# EAGLE board NILMCape (EAGLE 6.4)

Size 100 x 100 mm. Coordinates in mm from the lower left corner, seen from the top.
Copper layers (1*16): Top 0.035mm / dielectric 1.5mm / Bottom 0.035mm
Design rules "default": minimum track width 10mil, minimum drill 24mil, track to track 8mil, track to pad 8mil, pad to pad 8mil, via to via 8mil, smd to smd 8mil, copper to edge 40mil, drill to drill 8mil, minimum pad ring 10mil, minimum via ring 8mil, stop-mask expansion 4mil, vias tented up to drill 0mil, thermal gap 10mil

## Footprints (pad centres in the part's own frame; a part is rotated, then mirrored left to right if it is on the bottom)
0805 = smd 0.8 x 1.2: 1 -0.9,0; 2 0.9,0
1210 = smd 1.2 x 2: 1 -1.6,0; 2 1.6,0
CPOL-RADIAL-100UF-25V = drill 0.7 pad 1.651 square: 1 1.27,0 | drill 0.7 pad 1.651: 2 -1.27,0
CPOL-RADIAL-10UF-25V = drill 0.7 pad 1.651 square: 1 1.27,0 | drill 0.7 pad 1.651: 2 -1.27,0
1206 = smd 1.6 x 1.8: 1 -1.4,0; 2 1.4,0
PM64 = smd 1.676 x 0.279: 1 -5.613,3.759; 2 -5.613,3.251; 3 -5.613,2.743; 4 -5.613,2.261; 5 -5.613,1.753; 6 -5.613,1.245; 7 -5.613,0.762; 8 -5.613,0.254; 9 -5.613,-0.254; 10 -5.613,-0.762; 11 -5.613,-1.245; 12 -5.613,-1.753; 13 -5.613,-2.261; 14 -5.613,-2.743; 15 -5.613,-3.251; 16 -5.613,-3.759; 33 5.613,-3.759; 34 5.613,-3.251; 35 5.613,-2.743; 36 5.613,-2.261; 37 5.613,-1.753; 38 5.613,-1.245; 39 5.613,-0.762; 40 5.613,-0.254; 41 5.613,0.254; 42 5.613,0.762; 43 5.613,1.245; 44 5.613,1.753; 45 5.613,2.261; 46 5.613,2.743; 47 5.613,3.251; 48 5.613,3.759 | smd 0.279 x 1.676: 17 -3.759,-5.613; 18 -3.251,-5.613; 19 -2.743,-5.613; 20 -2.261,-5.613; 21 -1.753,-5.613; 22 -1.245,-5.613; 23 -0.762,-5.613; 24 -0.254,-5.613; 25 0.254,-5.613; 26 0.762,-5.613; 27 1.245,-5.613; 28 1.753,-5.613; 29 2.261,-5.613; 30 2.743,-5.613; 31 3.251,-5.613; 32 3.759,-5.613; 49 3.759,5.613; 50 3.251,5.613; 51 2.743,5.613; 52 2.261,5.613; 53 1.753,5.613; 54 1.245,5.613; 55 0.762,5.613; 56 0.254,5.613; 57 -0.254,5.613; 58 -0.762,5.613; 59 -1.245,5.613; 60 -1.753,5.613; 61 -2.261,5.613; 62 -2.743,5.613; 63 -3.251,5.613; 64 -3.759,5.613
5PFF = drill 0.8 square: 1 -1.91,0 | drill 0.8: 2 0,0; 3 1.91,0 | drill 2: A1 -7.5,21.4; A2 -6.5,21.4; A3 -3.5,21.4; A4 -5.5,21.4; A5 -4.5,21.4; B1 8,21.4; B2 5,21.4; B3 7,21.4; B4 4,21.4; B5 6,21.4
SOIC-16 = smd 1.549 x 0.61: 1 -2.692,4.445; 2 -2.692,3.175; 3 -2.692,1.905; 4 -2.692,0.635; 5 -2.692,-0.635; 6 -2.692,-1.905; 7 -2.692,-3.175; 8 -2.692,-4.445; 9 2.692,-4.445; 10 2.692,-3.175; 11 2.692,-1.905; 12 2.692,-0.635; 13 2.692,0.635; 14 2.692,1.905; 15 2.692,3.175; 16 2.692,4.445
DGG56 = smd 1.676 x 0.279: 1 -3.658,6.756; 2 -3.658,6.248; 3 -3.658,5.74; 4 -3.658,5.258; 5 -3.658,4.75; 6 -3.658,4.242; 7 -3.658,3.759; 8 -3.658,3.251; 9 -3.658,2.743; 10 -3.658,2.261; 11 -3.658,1.753; 12 -3.658,1.245; 13 -3.658,0.762; 14 -3.658,0.254; 15 -3.658,-0.254; 16 -3.658,-0.762; 17 -3.658,-1.245; 18 -3.658,-1.753; 19 -3.658,-2.261; 20 -3.658,-2.743; 21 -3.658,-3.251; 22 -3.658,-3.759; 23 -3.658,-4.242; 24 -3.658,-4.75; 25 -3.658,-5.258; 26 -3.658,-5.74; 27 -3.658,-6.248; 28 -3.658,-6.756; 29 3.658,-6.756; 30 3.658,-6.248; 31 3.658,-5.74; 32 3.658,-5.258; 33 3.658,-4.75; 34 3.658,-4.242; 35 3.658,-3.759; 36 3.658,-3.251; 37 3.658,-2.743; 38 3.658,-2.261; 39 3.658,-1.753; 40 3.658,-1.245; 41 3.658,-0.762; 42 3.658,-0.254; 43 3.658,0.254; 44 3.658,0.762; 45 3.658,1.245; 46 3.658,1.753; 47 3.658,2.261; 48 3.658,2.743; 49 3.658,3.251; 50 3.658,3.759; 51 3.658,4.242; 52 3.658,4.75; 53 3.658,5.258; 54 3.658,5.74; 55 3.658,6.248; 56 3.658,6.756
RKG41 = smd 1.6 x 1.702: 1 0,0; 11 0,-10.109; 19 8.179,-10.109; 29 8.179,0 | smd 0.94 x 0.61: 2 -0.33,-1.448; 3 -0.33,-2.362; 4 -0.33,-3.251; 5 -0.33,-4.166; 6 -0.33,-5.055; 7 -0.33,-5.944; 8 -0.33,-6.858; 9 -0.33,-7.747; 10 -0.33,-8.661; 20 8.509,-8.661; 21 8.509,-7.747; 22 8.509,-6.858; 23 8.509,-5.944; 24 8.509,-5.055; 25 8.509,-4.166; 26 8.509,-3.251; 27 8.509,-2.362; 28 8.509,-1.448 | smd 0.61 x 0.94: 12 1.397,-10.49; 13 2.286,-10.49; 14 3.2,-10.49; 15 4.089,-10.49; 16 4.978,-10.49; 17 5.893,-10.49; 18 6.782,-10.49; 30 6.782,0.381; 31 5.893,0.381; 32 4.978,0.381; 33 4.089,0.381; 34 3.2,0.381; 35 2.286,0.381; 36 1.397,0.381 | smd 1.1 x 2.25: 37 3.88,-1.75 | smd 3.1 x 2.2: 38 2.8,-5.16; 39 2.8,-8.64 | smd 1.4 x 1.24: 40 6.43,-9.11 | smd 2.04 x 3.05: 41 6.75,-6.37
RGW20_3P15X3P15 = smd 0.991 x 0.356: 1 -2.388,1.295; 2 -2.388,0.66; 3 -2.388,0; 4 -2.388,-0.66; 5 -2.388,-1.295; 11 2.388,-1.295; 12 2.388,-0.66; 13 2.388,0; 14 2.388,0.66; 15 2.388,1.295 | smd 0.356 x 0.991: 6 -1.295,-2.388; 7 -0.66,-2.388; 8 0,-2.388; 9 0.66,-2.388; 10 1.295,-2.388; 16 1.295,2.388; 17 0.66,2.388; 18 0,2.388; 19 -0.66,2.388; 20 -1.295,2.388 | smd 3.15 x 3.15: 21 0,0
KVU3 = smd 0.94 x 2.489: 1 -2.286,-6.401; 3 2.286,-6.401 | smd 6.706 x 6.528: 2 0,0.152
PW14 = smd 1.676 x 0.356: 1 -2.819,1.956; 2 -2.819,1.295; 3 -2.819,0.66; 4 -2.819,0; 5 -2.819,-0.66; 6 -2.819,-1.295; 7 -2.819,-1.956; 8 2.819,-1.956; 9 2.819,-1.295; 10 2.819,-0.66; 11 2.819,0; 12 2.819,0.66; 13 2.819,1.295; 14 2.819,1.956
DGN8_1P89X1P57 = smd 1.575 x 0.432: 1 -2.083,0.965; 2 -2.083,0.33; 3 -2.083,-0.33; 4 -2.083,-0.965; 5 2.083,-0.965; 6 2.083,-0.33; 7 2.083,0.33; 8 2.083,0.965 | smd 1.575 x 1.88: EPAD 0,0
BEAGLEBONE_SHIELD = drill 1 square: 1 4.445,19.05; 47 52.705,19.05 | drill 1: 2 1.905,19.05; 3 4.445,21.59; 4 1.905,21.59; 5 4.445,24.13; 6 1.905,24.13; 7 4.445,26.67; 8 1.905,26.67; 9 4.445,29.21; 10 1.905,29.21; 11 4.445,31.75; 12 1.905,31.75; 13 4.445,34.29; 14 1.905,34.29; 15 4.445,36.83; 16 1.905,36.83; 17 4.445,39.37; 18 1.905,39.37; 19 4.445,41.91; 20 1.905,41.91; 21 4.445,44.45; 22 1.905,44.45; 23 4.445,46.99; 24 1.905,46.99; 25 4.445,49.53; 26 1.905,49.53; 27 4.445,52.07; 28 1.905,52.07; 29 4.445,54.61; 30 1.905,54.61; 31 4.445,57.15; 32 1.905,57.15; 33 4.445,59.69; 34 1.905,59.69; 35 4.445,62.23; 36 1.905,62.23; 37 4.445,64.77; 38 1.905,64.77; 39 4.445,67.31; 40 1.905,67.31; 41 4.445,69.85; 42 1.905,69.85; 43 4.445,72.39; 44 1.905,72.39; 45 4.445,74.93; 46 1.905,74.93; 48 50.165,19.05; 49 52.705,21.59; 50 50.165,21.59; 51 52.705,24.13; 52 50.165,24.13; 53 52.705,26.67; 54 50.165,26.67; 55 52.705,29.21; 56 50.165,29.21; 57 52.705,31.75; 58 50.165,31.75; 59 52.705,34.29; 60 50.165,34.29; 61 52.705,36.83; 62 50.165,36.83; 63 52.705,39.37; 64 50.165,39.37; 65 52.705,41.91; 66 50.165,41.91; 67 52.705,44.45; 68 50.165,44.45; 69 52.705,46.99; 70 50.165,46.99; 71 52.705,49.53; 72 50.165,49.53; 73 52.705,52.07; 74 50.165,52.07; 75 52.705,54.61; 76 50.165,54.61; 77 52.705,57.15; 78 50.165,57.15; 79 52.705,59.69; 80 50.165,59.69; 81 52.705,62.23; 82 50.165,62.23; 83 52.705,64.77; 84 50.165,64.77; 85 52.705,67.31; 86 50.165,67.31; 87 52.705,69.85; 88 50.165,69.85; 89 52.705,72.39; 90 50.165,72.39; 91 52.705,74.93; 92 50.165,74.93
TSSOP14_MC = smd 1.473 x 0.356: 1 -2.819,1.956; 2 -2.819,1.295; 3 -2.819,0.66; 4 -2.819,0; 5 -2.819,-0.66; 6 -2.819,-1.295; 7 -2.819,-1.956; 8 2.819,-1.956; 9 2.819,-1.295; 10 2.819,-0.66; 11 2.819,0; 12 2.819,0.66; 13 2.819,1.295; 14 2.819,1.956

## Placement (x,y rotation side)
C1  .33uF  [0805]  10.16,89.53 0 top
C2  .33uF  [0805]  15.24,89.53 0 top
C3  .33uF  [0805]  20.32,98.43 180 top
C4  .33uF  [0805]  15.24,98.43 180 top
C5  .33uF  [0805]  -11.43,97.16 0 top  (outside the outline)
C6  .33uF  [0805]  -7.62,97.16 0 top  (outside the outline)
C7  .33uF  [0805]  -11.43,92.07 0 top  (outside the outline)
C8  4.7uF 50V  [1210]  74.93,70.48 270 top
C9  .33uF  [0805]  -7.62,92.07 0 top  (outside the outline)
C10  1uF  [0805]  -11.43,76.84 0 top  (outside the outline)
C11  1uF  [0805]  -11.43,107.31 0 top  (outside the outline)
C12  4.7uF 50V  [1210]  78.1,70.48 270 top
C13  2.2uF 100V  [1210]  81.28,70.48 270 top
C14  22uF 100V  [CPOL-RADIAL-100UF-25V]  66.04,79.38 270 top
C15  22uF 25V  [1210]  71.75,79.38 270 top
C16  22uF 25V  [1210]  74.93,79.38 270 top
C17  22uF 25V  [1210]  78.1,79.38 270 top
C18  22uF 25V  [1210]  81.28,79.38 270 top
C19  10nF  [0805]  82.55,66.67 0 top
C20  22uF  [1210]  67.31,66.67 90 top
C21  2.2uF 100V  [1210]  71.75,94.62 270 top
C22  2.2uF 100V  [1210]  74.93,94.62 270 top
C23  22uF  [1210]  78.1,94.62 90 top
C24  2.2uF 100V  [1210]  71.12,85.72 270 top
C25  22uF  [1210]  81.28,94.62 90 top
C26  10nF  [0805]  81.28,85.72 270 top
C27  27uF 100V  [CPOL-RADIAL-100UF-25V]  66.04,94.62 90 top
C28  1uF  [0805]  49.53,89.53 180 top
C29  47uF  [1210]  54.61,94.62 270 top
C30  1uF  [0805]  49.53,74.29 180 top
C31  10nF  [0805]  52.07,80.65 270 top
C32  47uF  [1210]  45.72,80.65 270 top
C33  10uF  [CPOL-RADIAL-10UF-25V]  38.1,71.75 0 top
C34  .1uF  [0805]  31.75,34.92 90 top
C35  .1uF  [0805]  13.97,51.43 0 top
C36  .1uF  [0805]  13.97,38.73 0 top
C37  .1uF  [0805]  13.97,23.49 0 top
C38  .1uF  [0805]  34.29,34.92 90 top
C39  .1uF  [0805]  41.91,9.52 0 top
C40  .1uF  [0805]  46.99,34.92 90 top
C41  .1uF  [0805]  13.97,8.25 0 top
C42  .1uF  [0805]  19.05,34.92 90 top
C43  .1uF  [0805]  13.97,36.2 0 top
C44  .1uF  [0805]  13.97,20.95 0 top
C45  .1uF  [0805]  41.91,22.22 0 top
C46  10uF  [1210]  -10.16,-17.15 0 top  (outside the outline)
C47  10uF  [1210]  -10.16,-20.96 0 top  (outside the outline)
C48  10uF  [1210]  -10.16,-24.77 0 top  (outside the outline)
C49  10nF  [0805]  -11.43,-34.93 0 top  (outside the outline)
C50  10nF  [0805]  -11.43,-40.01 0 top  (outside the outline)
C51  10uF  [1206]  -10.16,-65.41 0 top  (outside the outline)
C52  10uF  [1206]  -10.16,-60.32 0 top  (outside the outline)
C53  10uF  [1210]  -10.16,-69.22 0 top  (outside the outline)
C54  10uF  [1210]  -10.16,-73.03 0 top  (outside the outline)
C55  .1uF  [0805]  -11.43,-78.1 0 top  (outside the outline)
C56  10uF  [1210]  -10.16,-87 0 top  (outside the outline)
C57  .1uF  [0805]  -11.43,-83.19 0 top  (outside the outline)
C58  1uF  [0805]  -11.43,-92.07 0 top  (outside the outline)
C59  .1uF  [0805]  -11.43,-97.16 0 top  (outside the outline)
C60  .1uF  [0805]  -11.43,-102.24 0 top  (outside the outline)
C61  .1uF  [0805]  -11.43,-107.31 0 top  (outside the outline)
C62  .1uF  [0805]  -11.43,-112.4 0 top  (outside the outline)
C63  .1uF  [0805]  -11.43,-117.47 0 top  (outside the outline)
C64  .1uF  [0805]  -11.43,-122.56 0 top  (outside the outline)
C65  .1uF  [0805]  -20.32,-178.44 0 top  (outside the outline)
C66  .1uF  [0805]  -20.32,-182.25 0 top  (outside the outline)
C67  .1uF  [0805]  -20.32,-186.06 0 top  (outside the outline)
C68  .1uF  [0805]  -20.32,-189.86 0 top  (outside the outline)
C69  .1uF  [0805]  -20.32,-193.67 0 top  (outside the outline)
C70  .1uF  [0805]  -20.32,-197.48 0 top  (outside the outline)
C71  .1uF  [0805]  -20.32,-202.56 0 top  (outside the outline)
C72  10nF  [0805]  -20.32,-207.64 0 top  (outside the outline)
C73  10nF  [0805]  -20.32,-212.72 0 top  (outside the outline)
C74  10nF  [0805]  -20.32,-217.81 0 top  (outside the outline)
C75  .1uF  [0805]  -20.32,-222.88 0 top  (outside the outline)
R1  8.2k  [0805]  -11.43,87 0 top  (outside the outline)
R2  8.2k  [0805]  20.32,88.26 180 top
R3  8.2k  [0805]  15.24,93.34 0 top
R4  8.2k  [0805]  10.16,93.34 0 top
R5  8.2k  [0805]  20.32,93.34 180 top
R6  1k  [0805]  -11.43,112.4 0 top  (outside the outline)
R7  8.2k  [0805]  -7.62,87 0 top  (outside the outline)
R8  8.2k  [0805]  -11.43,81.91 0 top  (outside the outline)
R9  8.2k  [0805]  -7.62,81.91 0 top  (outside the outline)
R10  1k  [0805]  -11.43,102.23 0 top  (outside the outline)
R11  178k  [0805]  91.44,66.67 270 top
R12  0  [0805]  86.36,64.13 90 top
R13  1k  [0805]  -11.43,71.75 0 top  (outside the outline)
R14  0  [0805]  -20.32,-160.66 0 top  (outside the outline)
R15  174k  [0805]  81.28,64.13 90 top
R16  15.8k  [0805]  83.82,64.13 270 top
R17  178k  [0805]  78.74,98.43 180 top
R18  178k  [0805]  78.74,85.72 270 top
R19  174k  [0805]  74.93,98.43 180 top
R20  15.8k  [0805]  76.2,85.72 270 top
R21  0  [0805]  73.66,85.72 270 top
R22  0  [0805]  96.52,76.84 90 top
R23  1.5M  [0805]  49.53,80.65 90 top
R24  162k  [0805]  49.53,76.84 0 top
R25  499k  [0805]  -11.43,-45.09 0 top  (outside the outline)
R26  154k  [0805]  -11.43,-50.16 0 top  (outside the outline)
R27  0  [0805]  -20.32,-165.73 0 top  (outside the outline)
U1  ADS8568_PM_64  [PM64]  29.21,70.48 0 top
U2  ACS756KCA-050B-PFF-T  [5PFF]  55.88,24.77 270 top
U3  SI8663BC-B-IS1  [SOIC-16]  40.64,34.92 270 top
U4  SN74CBT16390_DGG  [DGG56]  29.21,18.41 0 top
U5  TPS84250_RKG_41  [RKG41]  92.71,84.46 180 top
U6  TPS7A3301_RGW_20  [RGW20_3P15X3P15]  57.15,79.38 0 top
U7  LP2950-33_KVU_3  [KVU3]  57.15,66.67 90 top
U8  SI8663BC-B-IS1  [SOIC-16]  13.97,14.6 0 top
U9  TL074_PW_14  [PW14]  13.97,83.19 0 top
U10  SI8663BC-B-IS1  [SOIC-16]  13.97,29.84 0 top
U11  SI8663BC-B-IS1  [SOIC-16]  13.97,45.09 0 top
U12  SI8663BC-B-IS1  [SOIC-16]  25.4,34.92 270 top
U13  SI8663BC-B-IS1  [SOIC-16]  41.91,15.87 0 top
U14  SN74CBT16390_DGG  [DGG56]  29.21,50.16 0 top
U15  TPS7A4901_DGN_8  [DGN8_1P89X1P57]  -7.62,-29.84 0 top  (outside the outline)
U16  SI8660BC-B-IS1  [SOIC-16]  -17.78,-139.06 0 top  (outside the outline)
U$1  BEAGLEBONE_OUTLINE  [BEAGLEBONE_SHIELD]  0,-14.61 0 top
U$2  TPS84259_RKG_41  [RKG41]  92.71,69.22 180 top
U$3  TPS7A4700_RGW_20  [RGW20_3P15X3P15]  49.53,94.62 270 top
U$4  MAX548X  [TSSOP14_MC]  -7.62,-128.91 0 top  (outside the outline)
U$5  MAX548X  [TSSOP14_MC]  -17.78,-147.95 0 top  (outside the outline)
U$6  MAX548X  [TSSOP14_MC]  -17.78,-154.31 0 top  (outside the outline)
U$7  MAX548X  [TSSOP14_MC]  -17.78,-172.09 0 top  (outside the outline)

## Library data of the parts
C1-C13 C15-C75 R1-R10 R13 R14 R27 U1 U3-U16 U$1-U$7 = SensorCape
C14 R11 R12 R15-R26 = ASL
U2 = SensorCape; TEMP: -40 to +125

## Nets
AA1_R_IN: R27.1 U$4.10
AA1_R_OUT: C73.2 U1.42 U$4.11
AA2_R_IN: U$5.10
AA2_R_OUT: C74.2 U1.47 U$5.11
AA3_R_IN: U2.3 U$7.10
AA3_R_OUT: C72.2 U1.49 U$7.11
ADC_DB0: U1.33 U14.1
ADC_DB1: U1.32 U14.54
ADC_DB2: U1.31 U14.4
ADC_DB3: U1.30 U14.51
ADC_DB4: U1.29 U14.7
ADC_DB5: U1.28 U14.48
ADC_DB6: U1.27 U14.10
ADC_DB7: U1.26 U14.45
ADC_DB8: U1.23 U14.15
ADC_DB9: U1.22 U14.40
ADC_DB10: U1.21 U14.18
ADC_DB11: U1.20 U14.37
ADC_DB12: U1.19 U14.21
ADC_DB13: U1.18 U14.34
ADC_DB14: U1.17 U14.24
ADC_DB15: U1.16 U14.31
AIN0: U$1.85
BB_DB0: U4.1 U$1.57
BB_DB1: U4.54 U$1.59
BB_DB2: U4.4 U$1.61
BB_DB3: U4.51 U$1.67
BB_DB4: U4.7 U$1.69
BB_DB5: U4.48 U$1.71
BB_DB6: U4.10 U$1.73
BB_DB7: U4.45 U$1.75
BB_DB8: U4.15 U$1.77
BB_DB9: U4.40 U$1.58
BB_DB10: U4.18 U$1.60
BB_DB11: U4.37 U$1.62
BB_DB12: U4.21 U$1.68
BB_DB13: U4.34 U$1.70
BB_DB14: U4.24 U$1.72
BB_DB15: U4.31 U$1.88
BBGND: C70.2 U16.8 U$1.1 U$1.2 U$1.47 U$1.48 U$1.89 U$1.90 U$1.91 U$1.92
BBVDD3V3: C70.1 U16.1 U$1.49
BUSY: U1.35
CONV_A: U1.37
CONV_B: U1.38
CONV_C: U1.39
CONV_D: U1.40
CS*: U1.13
GAIN_R_IN: R13.2 R14.1 U9.13 U$6.10
GAIN_R_OUT: R14.2 R27.2 U9.14 U$6.11
GND: C3.1 C4.1 C7.1 C9.1 C19.2 C28.2 C29.2 C30.2 C32.2 C33.2 C35.1 C36.1 C37.1 C38.1 C39.1 C40.1 C41.1 C42.1 C43.1 C45.1 C46.1 C47.2 C48.1 C49.2 C51.2 C52.2 C53.1 C54.1 C55.1 C56.1 C57.1 C58.2 C59.2 C60.2 C61.1 C62.1 C63.2 C64.2 C65.1 C66.1 C67.1 C68.1 C69.1 C71.2 C72.1 C73.1 C74.1 C75.2 R2.2 R5.2 R8.2 R9.2 R12.1 R16.1 R22.1 R24.1 R26.1 U1.2 U1.3 U1.5 U1.7 U1.8 U1.10 U1.15 U1.25 U1.34 U1.36 U1.44 U1.46 U1.51 U1.53 U1.54 U1.55 U1.58 U1.59 U1.60 U1.62 U1.64 U2.1 U3.8 U3.9 U6.7 U6.21 U7.2 U8.8 U8.9 U9.5 U9.12 U10.8 U10.9 U11.8 U11.9 U12.8 U12.9 U13.8 U13.9 U15.4 U15.EPAD U16.9 U$2.1 U$2.4 U$2.5 U$2.8 U$2.9 U$2.32 U$2.33 U$2.34 U$2.37 U$3.4 U$3.6 U$3.7 U$3.9 U$3.11 U$3.21 U$4.2 U$4.14 U$5.2 U$5.14 U$6.2 U$6.14 U$7.2 U$7.14
HOT_IN: C1.1 R3.2 U2.B1 U2.B2 U2.B3 U2.B4 U2.B5
HOT_TO_LOAD: U2.A1 U2.A2 U2.A3 U2.A4 U2.A5
HVDD: U9.4
HVDD_12A: C29.1 C54.2 C55.2 U1.1 U$3.1 U$3.3 U$3.20
HVDD_15D: C20.2 C23.2 C25.2 C52.1 R17.2 U5.10 U5.11 U5.12 U5.13 U5.14 U5.15 U5.39 U7.3 U15.5 U15.8 U$3.13 U$3.15 U$3.16
HVSS: U9.11
HVSS_12A: C31.1 C32.1 C56.2 C57.2 R23.2 U1.48 U6.1 U6.20
HVSS_15D: C15.2 C16.2 C17.2 C18.2 U6.13 U6.15 U6.16 U$2.16 U$2.17 U$2.18 U$2.19 U$2.20 U$2.40
N$1: C5.1 R1.2 R6.2 U9.7
N$2: C20.1 C21.2 C22.2 C23.1 C24.2 C25.1 C27.2 R21.2 U5.1 U5.4 U5.5 U5.16 U5.17 U5.18 U5.19 U5.20 U5.30 U5.32 U5.33 U5.34 U5.37 U5.40
N$3: C1.2 C2.1 R2.1 R5.1
N$4: C3.2 C4.2 R3.1 R4.2
N$5: R6.1 R10.1 U9.6
N$6: U16.15 U$4.3
N$7: C63.1 U1.56
N$9: C2.2 R4.1 U9.3
N$10: C5.2 C6.1 R8.1 R9.1
N$11: C7.2 C9.2 R1.1 R7.2
N$12: U16.11 U$6.3
N$13: C6.2 R7.1 U9.10
N$14: C10.2 U9.8 U9.9
N$15: C19.1 U$2.28
N$16: C31.2 R24.2 U6.3
N$18: R11.1 U$2.36
N$19: U16.12 U$5.3
N$20: U16.10 U$7.3
N$21: U16.14 U$4.4 U$5.4 U$6.4 U$7.4
N$26: U16.13 U$4.5 U$5.5 U$6.5 U$7.5
N$30: C10.1 R13.1
N$31: R12.2 U$2.30
N$32: C8.2 C12.2 C13.2 C14.2 C15.1 C16.1 C17.1 C18.1 R11.2 R22.2 U$2.10 U$2.11 U$2.12 U$2.13 U$2.14 U$2.15 U$2.39
N$33: C30.1 U6.14
N$34: C11.2 R10.2
N$35: C11.1 U9.1 U9.2
N$36: R15.1 R16.2 U$2.27
N$37: R17.1 U5.36
N$38: R18.2 U5.31
N$39: U$1.27
N$40: U$1.29
N$41: R19.1 R20.2 U5.27
N$42: U$1.28
N$43: C26.1 U5.28
N$44: C26.2 R18.1 R20.1 R21.1 U5.8 U5.9 U5.29
N$45: C28.1 U$3.14
N$46: U$1.30
N$47: U$1.31
N$48: U$1.33
N$49: U$1.35
N$50: U$1.37
N$51: U$1.32
N$52: U$1.34
N$53: U$1.36
N$54: U$1.38
N$55: U$1.45
N$56: U$1.46
N$57: U$1.43
N$58: U$1.44
N$59: U$1.41
N$60: U$1.42
N$61: U$1.39
N$62: U$1.40
N$63: U$1.11
N$64: U$1.12
N$65: C44.1
N$66: C34.1
N$67: U$1.13
N$68: U$1.14
N$69: U$1.15
N$70: U$1.16
N$71: U$1.17
N$72: U$1.19
N$73: U$1.20
N$74: U$1.21
N$75: U$1.18
N$76: U$1.22
N$77: U$1.7
N$78: U$1.3
N$79: U$1.5
N$80: U$1.4
N$81: U$1.6
N$82: U$1.24
N$83: U$1.26
N$84: U$1.23
N$85: U$1.25
N$86: C49.1 U15.6
N$87: C46.2 U1.6
N$89: C50.2 R25.1 R26.2 U15.2
N$90: U$1.9
N$91: U$1.8
N$92: U$1.10
N$93: C53.2 U1.43
N$94: C48.2 U1.50
N$96: C47.1 U1.63
R_DB0: U4.56 U12.15
R_DB1: U4.55 U12.14
R_DB2: U4.53 U12.13
R_DB3: U4.52 U11.15
R_DB4: U4.50 U11.14
R_DB5: U4.49 U11.13
R_DB6: U4.47 U10.15
R_DB7: U4.46 U10.14
R_DB8: U4.42 U10.13
R_DB9: U3.15 U4.41
R_DB10: U3.14 U4.39
R_DB11: U3.13 U4.38
R_DB12: U4.36 U8.15
R_DB13: U4.35 U8.14
R_DB14: U4.33 U8.13
R_DB15: U4.32 U13.15
R_DB_ADC0: U12.5 U14.56
R_DB_ADC1: U12.6 U14.55
R_DB_ADC2: U12.7 U14.53
R_DB_ADC3: U11.5 U14.52
R_DB_ADC4: U11.6 U14.50
R_DB_ADC5: U11.7 U14.49
R_DB_ADC6: U10.5 U14.47
R_DB_ADC7: U10.6 U14.46
R_DB_ADC8: U10.7 U14.42
R_DB_ADC9: U3.5 U14.41
R_DB_ADC10: U3.6 U14.39
R_DB_ADC11: U3.7 U14.38
R_DB_ADC12: U8.5 U14.36
R_DB_ADC13: U8.6 U14.35
R_DB_ADC14: U8.7 U14.33
R_DB_ADC15: U13.5 U14.32
RD*: U1.12
SYS_5V: U$1.53
VDD3V3_D: C33.1 C34.2 C35.2 C36.2 C37.2 C38.2 C39.2 C40.2 C41.2 C42.2 C43.2 C44.2 C45.2 C58.1 C65.2 C66.2 C67.2 C68.2 C69.2 U1.9 U1.24 U1.41 U3.1 U3.16 U7.1 U8.1 U8.16 U10.1 U10.16 U11.1 U11.16 U12.1 U12.16 U13.1 U13.16 U16.16 U$4.1 U$4.6 U$5.1 U$5.6 U$6.1 U$6.6 U$7.1 U$7.6
VDD5V0_A: C50.1 C51.1 C59.1 C60.1 C61.2 C62.2 C64.1 C71.1 C75.1 R25.2 U1.4 U1.14 U1.45 U1.52 U1.57 U1.61 U2.2 U15.1
VDD_3V3EXP: U$1.50
VDD_5V: U$1.51 U$1.52
VIN: C8.1 C12.1 C13.1 C14.1 C21.1 C22.1 C24.1 C27.1 R15.2 R19.2 U5.26 U$2.26
W_DB0: U4.2 U12.12
W_DB1: U4.3 U12.11
W_DB2: U4.5 U12.10
W_DB3: U4.6 U11.12
W_DB4: U4.8 U11.11
W_DB5: U4.9 U11.10
W_DB6: U4.11 U10.12
W_DB7: U4.12 U10.11
W_DB8: U4.16 U10.10
W_DB9: U3.12 U4.17
W_DB10: U3.11 U4.19
W_DB11: U3.10 U4.20
W_DB12: U4.22 U8.12
W_DB13: U4.23 U8.11
W_DB14: U4.25 U8.10
W_DB15: U4.26 U13.12
W_DB_ADC0: U12.2 U14.2
W_DB_ADC1: U12.3 U14.3
W_DB_ADC2: U12.4 U14.5
W_DB_ADC3: U11.2 U14.6
W_DB_ADC4: U11.3 U14.8
W_DB_ADC5: U14.9
W_DB_ADC6: U10.2 U11.4 U14.11
W_DB_ADC7: U10.3 U14.12
W_DB_ADC8: U10.4 U14.16
W_DB_ADC9: U3.2 U14.17
W_DB_ADC10: U3.3 U14.19
W_DB_ADC11: U3.4 U14.20
W_DB_ADC12: U8.2 U14.22
W_DB_ADC13: U8.3 U14.23
W_DB_ADC14: U8.4 U14.25
W_DB_ADC15: U13.2 U14.26
WR*: U1.11

## Tracks (layer width: path | path; a pad name or v marks a point on that pad's centre or on a via)
AA1_R_IN  (1 unrouted)
AA1_R_OUT  (2 unrouted)
AA2_R_OUT  (2 unrouted)
AA3_R_IN  (1 unrouted)
AA3_R_OUT  (2 unrouted)
ADC_DB0  (1 unrouted)
ADC_DB1  (1 unrouted)
ADC_DB2  (1 unrouted)
ADC_DB3  (1 unrouted)
ADC_DB4  (1 unrouted)
ADC_DB5  (1 unrouted)
ADC_DB6  (1 unrouted)
ADC_DB7  (1 unrouted)
ADC_DB8  (1 unrouted)
ADC_DB9  (1 unrouted)
ADC_DB10  (1 unrouted)
ADC_DB11  (1 unrouted)
ADC_DB12  (1 unrouted)
ADC_DB13  (1 unrouted)
ADC_DB14  (1 unrouted)
ADC_DB15  (1 unrouted)
BB_DB0  (1 unrouted)
BB_DB1  (1 unrouted)
BB_DB2  (1 unrouted)
BB_DB3  (1 unrouted)
BB_DB4  (1 unrouted)
BB_DB5  (1 unrouted)
BB_DB6  (1 unrouted)
BB_DB7  (1 unrouted)
BB_DB8  (1 unrouted)
BB_DB9  (1 unrouted)
BB_DB10  (1 unrouted)
BB_DB11  (1 unrouted)
BB_DB12  (1 unrouted)
BB_DB13  (1 unrouted)
BB_DB14  (1 unrouted)
BB_DB15  (1 unrouted)
BBGND  (9 unrouted)
BBVDD3V3  (2 unrouted)
GAIN_R_IN  (3 unrouted)
GAIN_R_OUT  (3 unrouted)
GND  (121 unrouted)
HOT_IN  (6 unrouted)
HOT_TO_LOAD  (4 unrouted)
HVDD_12A  (6 unrouted)
HVDD_15D  (17 unrouted)
HVSS_12A  (7 unrouted)
HVSS_15D  (12 unrouted)
N$1  (3 unrouted)
N$2  (21 unrouted)
N$3  (3 unrouted)
N$4  (3 unrouted)
N$5  (2 unrouted)
N$6  (1 unrouted)
N$7  (1 unrouted)
N$9  (2 unrouted)
N$10  (3 unrouted)
N$11  (3 unrouted)
N$12  (1 unrouted)
N$13  (2 unrouted)
N$14  (2 unrouted)
N$15  (1 unrouted)
N$16  (2 unrouted)
N$18  (1 unrouted)
N$19  (1 unrouted)
N$20  (1 unrouted)
N$21  (4 unrouted)
N$26  (4 unrouted)
N$30  (1 unrouted)
N$31  (1 unrouted)
N$32  (16 unrouted)
N$33  (1 unrouted)
N$34  (1 unrouted)
N$35  (2 unrouted)
N$36  (2 unrouted)
N$37  (1 unrouted)
N$38  (1 unrouted)
N$41  (2 unrouted)
N$43  (1 unrouted)
N$44  (6 unrouted)
N$45  (1 unrouted)
N$86  (1 unrouted)
N$87  (1 unrouted)
N$89  (3 unrouted)
N$93  (1 unrouted)
N$94  (1 unrouted)
N$96  (1 unrouted)
R_DB0  (1 unrouted)
R_DB1  (1 unrouted)
R_DB2  (1 unrouted)
R_DB3  (1 unrouted)
R_DB4  (1 unrouted)
R_DB5  (1 unrouted)
R_DB6  (1 unrouted)
R_DB7  (1 unrouted)
R_DB8  (1 unrouted)
R_DB9  (1 unrouted)
R_DB10  (1 unrouted)
R_DB11  (1 unrouted)
R_DB12  (1 unrouted)
R_DB13  (1 unrouted)
R_DB14  (1 unrouted)
R_DB15  (1 unrouted)
R_DB_ADC0  (1 unrouted)
R_DB_ADC1  (1 unrouted)
R_DB_ADC2  (1 unrouted)
R_DB_ADC3  (1 unrouted)
R_DB_ADC4  (1 unrouted)
R_DB_ADC5  (1 unrouted)
R_DB_ADC6  (1 unrouted)
R_DB_ADC7  (1 unrouted)
R_DB_ADC8  (1 unrouted)
R_DB_ADC9  (1 unrouted)
R_DB_ADC10  (1 unrouted)
R_DB_ADC11  (1 unrouted)
R_DB_ADC12  (1 unrouted)
R_DB_ADC13  (1 unrouted)
R_DB_ADC14  (1 unrouted)
R_DB_ADC15  (1 unrouted)
VDD3V3_D  (43 unrouted)
VDD5V0_A  (17 unrouted)
VDD_5V  (1 unrouted)
VIN  (11 unrouted)
W_DB0  (1 unrouted)
W_DB1  (1 unrouted)
W_DB2  (1 unrouted)
W_DB3  (1 unrouted)
W_DB4  (1 unrouted)
W_DB5  (1 unrouted)
W_DB6  (1 unrouted)
W_DB7  (1 unrouted)
W_DB8  (1 unrouted)
W_DB9  (1 unrouted)
W_DB10  (1 unrouted)
W_DB11  (1 unrouted)
W_DB12  (1 unrouted)
W_DB13  (1 unrouted)
W_DB14  (1 unrouted)
W_DB15  (1 unrouted)
W_DB_ADC0  (1 unrouted)
W_DB_ADC1  (1 unrouted)
W_DB_ADC2  (1 unrouted)
W_DB_ADC3  (1 unrouted)
W_DB_ADC4  (1 unrouted)
W_DB_ADC6  (2 unrouted)
W_DB_ADC7  (1 unrouted)
W_DB_ADC8  (1 unrouted)
W_DB_ADC9  (1 unrouted)
W_DB_ADC10  (1 unrouted)
W_DB_ADC11  (1 unrouted)
W_DB_ADC12  (1 unrouted)
W_DB_ADC13  (1 unrouted)
W_DB_ADC14  (1 unrouted)
W_DB_ADC15  (1 unrouted)